# EAGLE board lna (EAGLE 9.6.1)
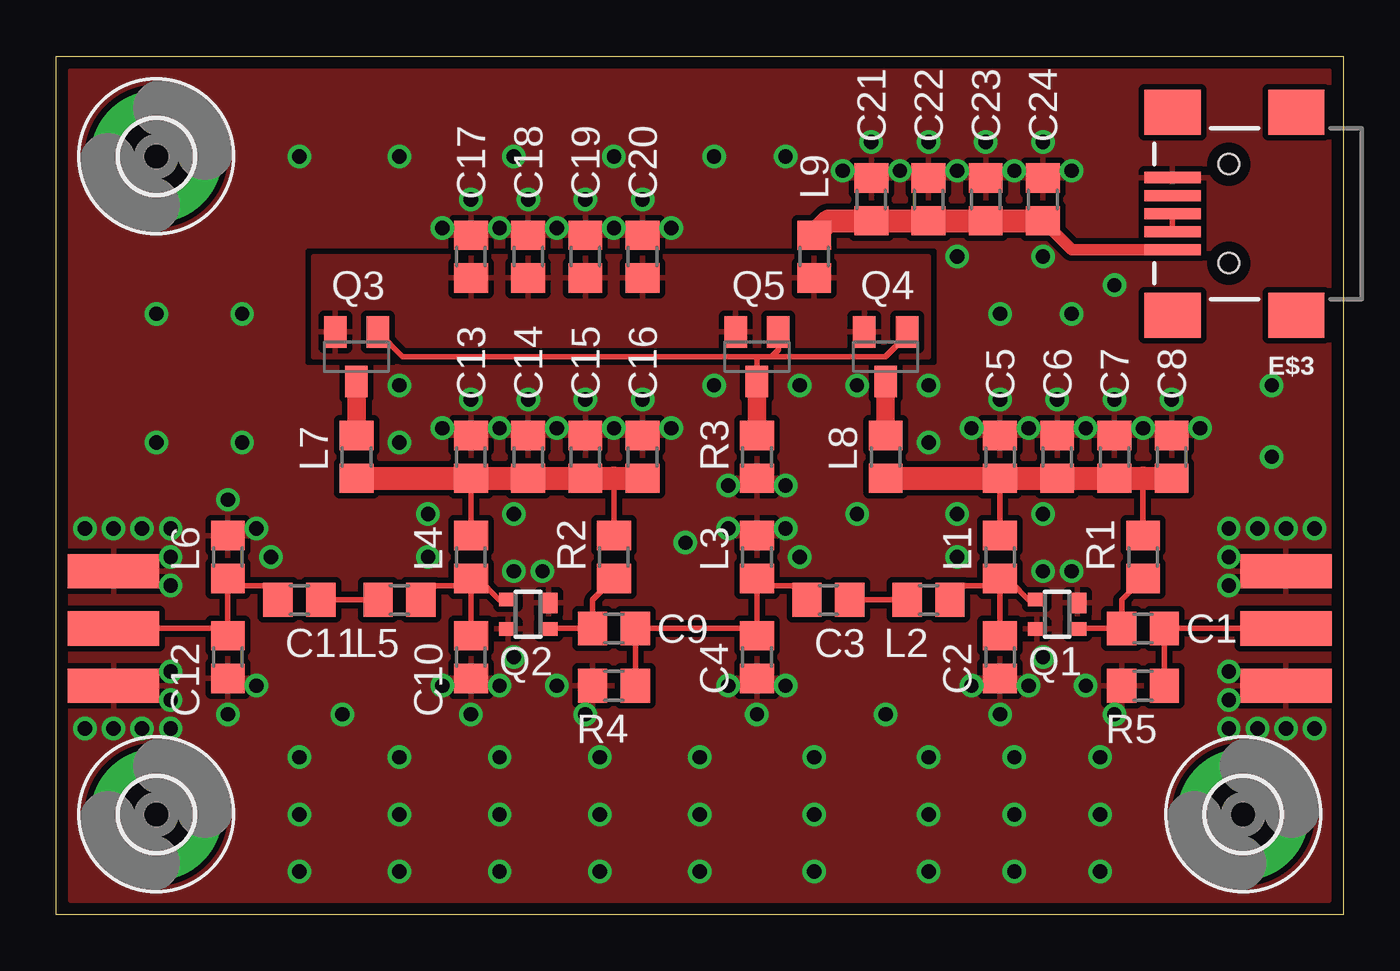
[diagram p0: board, top side]
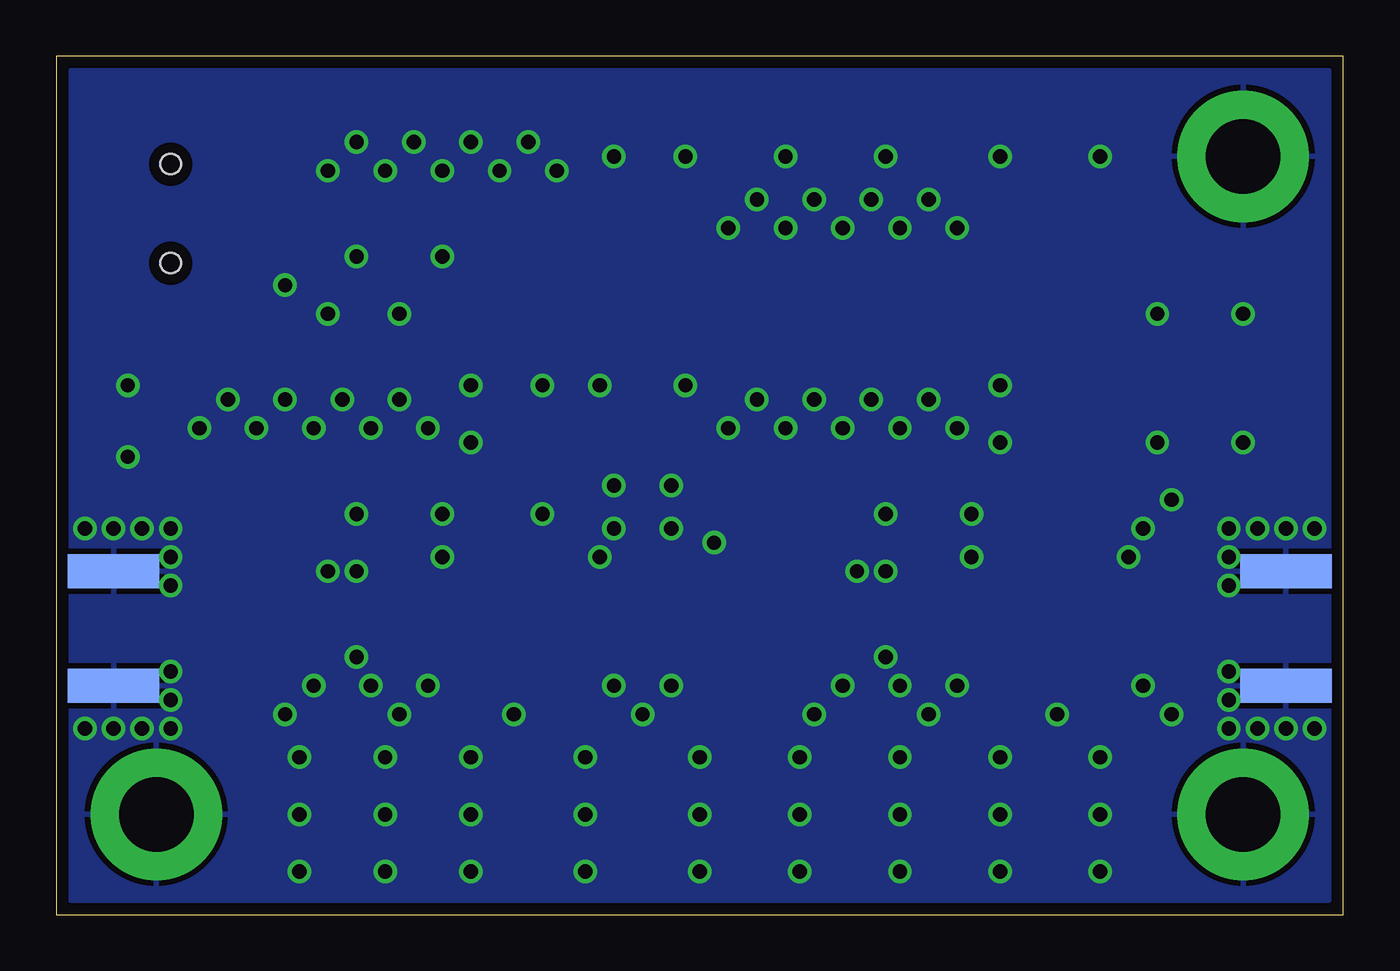
[diagram p1: board, bottom side, seen from below]

Size 57.15 x 38.1 mm. Coordinates in mm from the lower left corner, seen from the top.
Outline: 0,0 0,38.1 57.15,38.1 57.15,0 0,0
Copper layers (1*16): Top 0.035mm / dielectric 0.5mm / Bottom 0.035mm
Design rules "two_layer": minimum track width 5mil, minimum drill 10mil, track to track 5mil, track to pad 5mil, pad to pad 5mil, via to via 5mil, smd to smd 5mil, copper to edge 20mil, drill to drill 8mil, minimum pad ring 10mil, minimum via ring 8mil, stop-mask expansion 4mil, vias tented up to drill 0mil, thermal gap 10mil

## Footprints (pad centres in the part's own frame; a part is rotated, then mirrored left to right if it is on the bottom)
R0805 = smd 1.3 x 1.5: 1 -0.95,0; 2 0.95,0
SMA-EDGE = smd 1.524 x 4.064: GND@0 0,0; GND@1 5.08,0; SIG 2.54,0 | smd 1.524 x 4.064 bottom: GND@2 0,0; GND@3 5.08,0
USB-MINIB = smd 2.5 x 0.5: D+ 2.5,0; D- 2.5,0.8; GND 2.5,-1.6; ID 2.5,-0.8; VBUS 2.5,1.6 | smd 2.5 x 2: S1 -3,4.5; S2 2.5,4.5; S3 -3,-4.5; S4 2.5,-4.5 | hole 0.9: 0,2.2; 0,-2.2
3,3-PAD = drill 3.3 pad 5.842: B3,3 0,0
SOT343R = smd 0.9 x 0.8: 1 0.5,-0.9 | smd 0.6 x 0.8: 2 -0.65,-0.9; 3 -0.65,0.9; 4 0.65,0.9
SOT23-BEC = smd 1 x 1.4: B -0.95,-1.1; C 0,1.1; E 0.95,-1.1

## Placement (x,y rotation side)
C1  [R0805]  48.26,12.7 0 top
C2  [R0805]  41.91,11.43 270 top
C3  [R0805]  34.29,13.97 0 top
C4  [R0805]  31.11,11.43 270 top
C5  [R0805]  41.91,20.32 270 top
C6  [R0805]  44.45,20.32 270 top
C7  [R0805]  46.99,20.32 270 top
C8  [R0805]  49.53,20.32 270 top
C9  [R0805]  24.77,12.7 0 top
C10  [R0805]  18.41,11.43 270 top
C11  [R0805]  10.79,13.97 0 top
C12  [R0805]  7.62,11.43 270 top
C13  [R0805]  18.41,20.32 270 top
C14  [R0805]  20.95,20.32 270 top
C15  [R0805]  23.5,20.32 270 top
C16  [R0805]  26.04,20.32 270 top
C17  [R0805]  18.41,29.21 270 top
C18  [R0805]  20.95,29.21 270 top
C19  [R0805]  23.5,29.21 270 top
C20  [R0805]  26.04,29.21 270 top
C21  [R0805]  36.2,31.75 270 top
C22  [R0805]  38.73,31.75 270 top
C23  [R0805]  41.27,31.75 270 top
C24  [R0805]  43.81,31.75 270 top
E$1  [SMA-EDGE]  2.54,10.16 90 top
E$2  [SMA-EDGE]  54.61,10.16 90 top
E$3  [USB-MINIB]  52.07,31.11 180 top
E$4  [3,3-PAD]  4.45,4.45 0 top
E$5  [3,3-PAD]  52.7,4.45 0 top
E$6  [3,3-PAD]  4.45,33.66 0 top
L1  [R0805]  41.91,15.88 270 top
L2  [R0805]  38.73,13.97 0 top
L3  [R0805]  31.11,15.88 270 top
L4  [R0805]  18.41,15.88 270 top
L5  [R0805]  15.24,13.97 0 top
L6  [R0805]  7.62,15.88 270 top
L7  [R0805]  13.34,20.32 270 top
L8  [R0805]  36.83,20.32 270 top
L9  [R0805]  33.66,29.21 270 top
Q1  [SOT343R]  44.45,13.34 90 top
Q2  [SOT343R]  20.95,13.34 90 top
Q3  [SOT23-BEC]  13.34,24.77 180 top
Q4  [SOT23-BEC]  36.83,24.77 180 top
Q5  [SOT23-BEC]  31.11,24.77 180 top
R1  [R0805]  48.26,15.88 90 top
R2  [R0805]  24.77,15.88 90 top
R3  [R0805]  31.11,20.32 90 top
R4  [R0805]  24.77,10.16 180 top
R5  [R0805]  48.26,10.16 180 top

## Library data of the parts
C1-C24 L1-L9 Q3-Q5 R1-R5 = ref-packages
E$1 E$2 = SparkFun-Retired
E$3 = SparkFun-Connectors
E$4-E$6 = holes
Q1 Q2 = transistor-small-signal

## Nets
5V: C17.2 C18.2 C19.2 C20.2 L9.2 Q3.E Q4.E Q5.E
GND: C2.2 C4.2 C5.1 C6.1 C7.1 C8.1 C10.2 C12.2 C13.1 C14.1 C15.1 C16.1 C17.1 C18.1 C19.1 C20.1 C21.1 C22.1 C23.1 C24.1 E$1.GND@0 E$1.GND@1 E$1.GND@2 E$1.GND@3 E$2.GND@0 E$2.GND@1 E$2.GND@2 E$2.GND@3 E$3.GND E$4.B3,3 E$5.B3,3 E$6.B3,3 L3.1 L6.1 Q1.1 Q1.3 Q2.1 Q2.3 R3.1 R4.2 R5.2
S$1: C1.1 Q1.2 R1.1
S$2: C1.2 E$2.SIG R5.1
S$3: C9.1 Q2.2 R2.1
S$4: E$3.D+ E$3.D-
S$5: C3.1 C4.1 C9.2 L3.2 R4.1
S$6: C11.1 C12.1 E$1.SIG L6.2
S$7: C11.2 L5.1
S$8: C10.1 L4.2 L5.2 Q2.4
S$9: C13.2 C14.2 C15.2 C16.2 L4.1 L7.2 R2.2
S$10: C3.2 L2.1
S$11: C2.1 L1.2 L2.2 Q1.4
S$12: C5.2 C6.2 C7.2 C8.2 L1.1 L8.2 R1.2
S$13: L7.1 Q3.C
S$14: L8.1 Q4.C
S$16: Q3.B Q4.B Q5.B Q5.C R3.2
VBUS: C21.2 C22.2 C23.2 C24.2 E$3.VBUS L9.1

## Tracks (layer width: path | path; a pad name or v marks a point on that pad's centre or on a via)
5V
  pour Top (isolate 0.254): 11.43,29.21 38.73,29.21 38.73,24.77 11.43,24.77
GND  (via drill 0.64)
  other vias: 7.62,8.89 8.89,10.16 7.62,18.41 8.89,17.14 18.41,31.75 20.95,31.75 23.5,31.75 26.04,31.75 24.77,30.48 22.23,30.48 19.68,30.48 17.14,30.48 27.3,30.48 17.14,21.59 19.68,21.59 22.23,21.59 24.77,21.59 27.3,21.59 26.04,22.86 23.5,22.86 20.95,22.86 18.41,22.86 40.64,21.59 43.18,21.59 45.72,21.59 48.26,21.59 50.8,21.59 49.53,22.86 46.99,22.86 44.45,22.86 41.91,22.86 45.09,15.24 43.81,17.78 40.01,17.78 55.88,17.14 54.61,17.14 53.34,17.14 52.07,17.14 52.07,15.88 52.07,14.61 52.07,10.79 52.07,9.53 55.88,8.26 54.61,8.26 53.34,8.26 52.07,8.26 1.27,17.14 2.54,17.14 3.81,17.14 5.08,17.14 5.08,15.88 5.08,14.61 1.27,8.26 2.54,8.26 3.81,8.26 5.08,8.26 5.08,9.53 5.08,10.79 34.92,33.02 37.47,33.02 40.01,33.02 42.55,33.02 45.09,33.02 43.81,34.29 41.27,34.29 38.73,34.29 36.2,34.29 29.84,19.05 32.38,19.05 32.38,17.14 29.84,17.14 29.84,10.16 32.38,10.16 31.11,8.89 41.91,8.89 43.18,10.16 40.64,10.16 18.41,8.89 19.68,10.16 17.14,10.16 15.24,20.95 15.24,23.5 29.21,23.5 27.94,16.51 33.02,15.88 40.01,15.88 33.02,23.5 35.56,23.5 35.56,17.78 38.73,20.95 38.73,23.5 40.01,29.21 41.91,26.67 45.09,26.67 43.81,29.21 46.99,27.94 53.98,23.5 53.98,20.32 36.83,8.89 20.32,17.78 20.32,15.24 21.59,15.24 20.32,11.43 43.81,11.43 43.81,15.24 12.7,8.89 16.51,17.78 16.51,15.88 9.53,15.88 4.45,20.95 4.45,26.67 8.26,26.67 8.26,20.95 10.79,33.66 15.24,33.66 20.32,33.66 24.77,33.66 29.21,33.66 32.38,33.66 10.79,4.45 19.68,4.45 28.57,4.45 38.73,4.45 46.35,4.45 46.35,1.91 38.73,1.91 28.57,1.91 19.68,1.91 10.79,1.91 22.23,10.16 23.5,8.89 45.72,10.16 46.99,8.89 10.79,6.99 15.24,6.99 15.24,4.45 15.24,1.91 19.68,6.99 24.13,6.99 24.13,4.45 24.13,1.91 28.57,6.99 33.66,6.99 33.66,4.45 33.66,1.91 38.73,6.99 42.55,6.99 42.55,4.45 42.55,1.91 46.35,6.99
  pour Top (isolate 0.254, rank 6): 0.64,37.47 56.52,37.47 56.52,0.64 0.64,0.64
  pour Bottom (isolate 0.254, rank 6): 0.64,37.47 56.52,37.47 56.52,0.64 0.64,0.64
S$1
  Top 0.254: Q1.2 45.37,12.7 C1.1 47.31,13.97 R1.1
S$2
  Top 0.254: E$2.SIG C1.2 R5.1
S$3
  Top 0.254: Q2.2 21.87,12.7 C9.1 23.82,13.97 R2.1
S$4
  Top 0.254: E$3.D+ E$3.D-
S$5
  Top 0.254: C4.1 31.11,12.7 | 31.11,12.7 31.11,14.61 | 31.11,14.61 L3.2 | C3.1 32.7,14.61 31.11,14.61 | 31.11,12.7 C9.2 R4.1
S$6
  Top 0.254: E$1.SIG 7.3,12.7 7.46,12.54 | 7.46,12.54 C12.1 | L6.2 7.62,14.61 | 7.62,14.61 7.62,12.7 7.46,12.54 | C11.1 9.53,14.29 9.53,14.61 7.62,14.61
S$7
  Top 0.254: C11.2 L5.1
S$8
  Top 0.254: L5.2 16.82,14.61 18.09,14.61 L4.2 | Q2.4 19.67,13.98 18.73,14.93 L4.2 | C10.1 L4.2
S$9
  Top 0.254: L4.1 C13.2 | R2.2 24.77,19.37
  Top 1.016: C16.2 24.77,19.37 C15.2 C14.2 C13.2 L7.2
S$10
  Top 0.254: C3.2 L2.1
S$11
  Top 0.254: L2.2 40.32,14.61 41.59,14.61 41.75,14.77 | 41.75,14.77 L1.2 C2.1 | Q1.4 43.16,13.98 42.38,14.77 41.75,14.77
S$12
  Top 0.254: L1.1 C5.2 | R1.2 48.26,19.37
  Top 1.016: C8.2 48.26,19.37 C7.2 C6.2 C5.2 L8.2
S$13
  Top 0.813: Q3.C L7.1
S$14
  Top 0.813: Q4.C L8.1
S$16
  Top 0.254: 31.75,24.77 36.83,24.77 37.78,25.71 Q4.B 37.47,26.18 | 31.75,24.77 31.11,24.77 | 31.11,24.77 15.38,24.77 Q3.B | Q5.C 31.11,24.77 | Q5.B 32.06,25.08 31.75,24.77
  Top 0.813: R3.2 Q5.C
VBUS
  Top 0.508: E$3.VBUS 45.1,29.52 C24.2
  Top 1.016: L9.1 34.3,30.8 C21.2 C22.2 C23.2 C24.2